# Altium PCB BombaPCB.PcbDoc
Units mm, origin at the board's own origin, x right, y up, seen from the top; angles counter-clockwise.
Board outline 68.25 x 42.25 mm, 2 copper layers (Top Layer, Bottom Layer); 12 components, 25 nets, 97 pads, 0 vias.
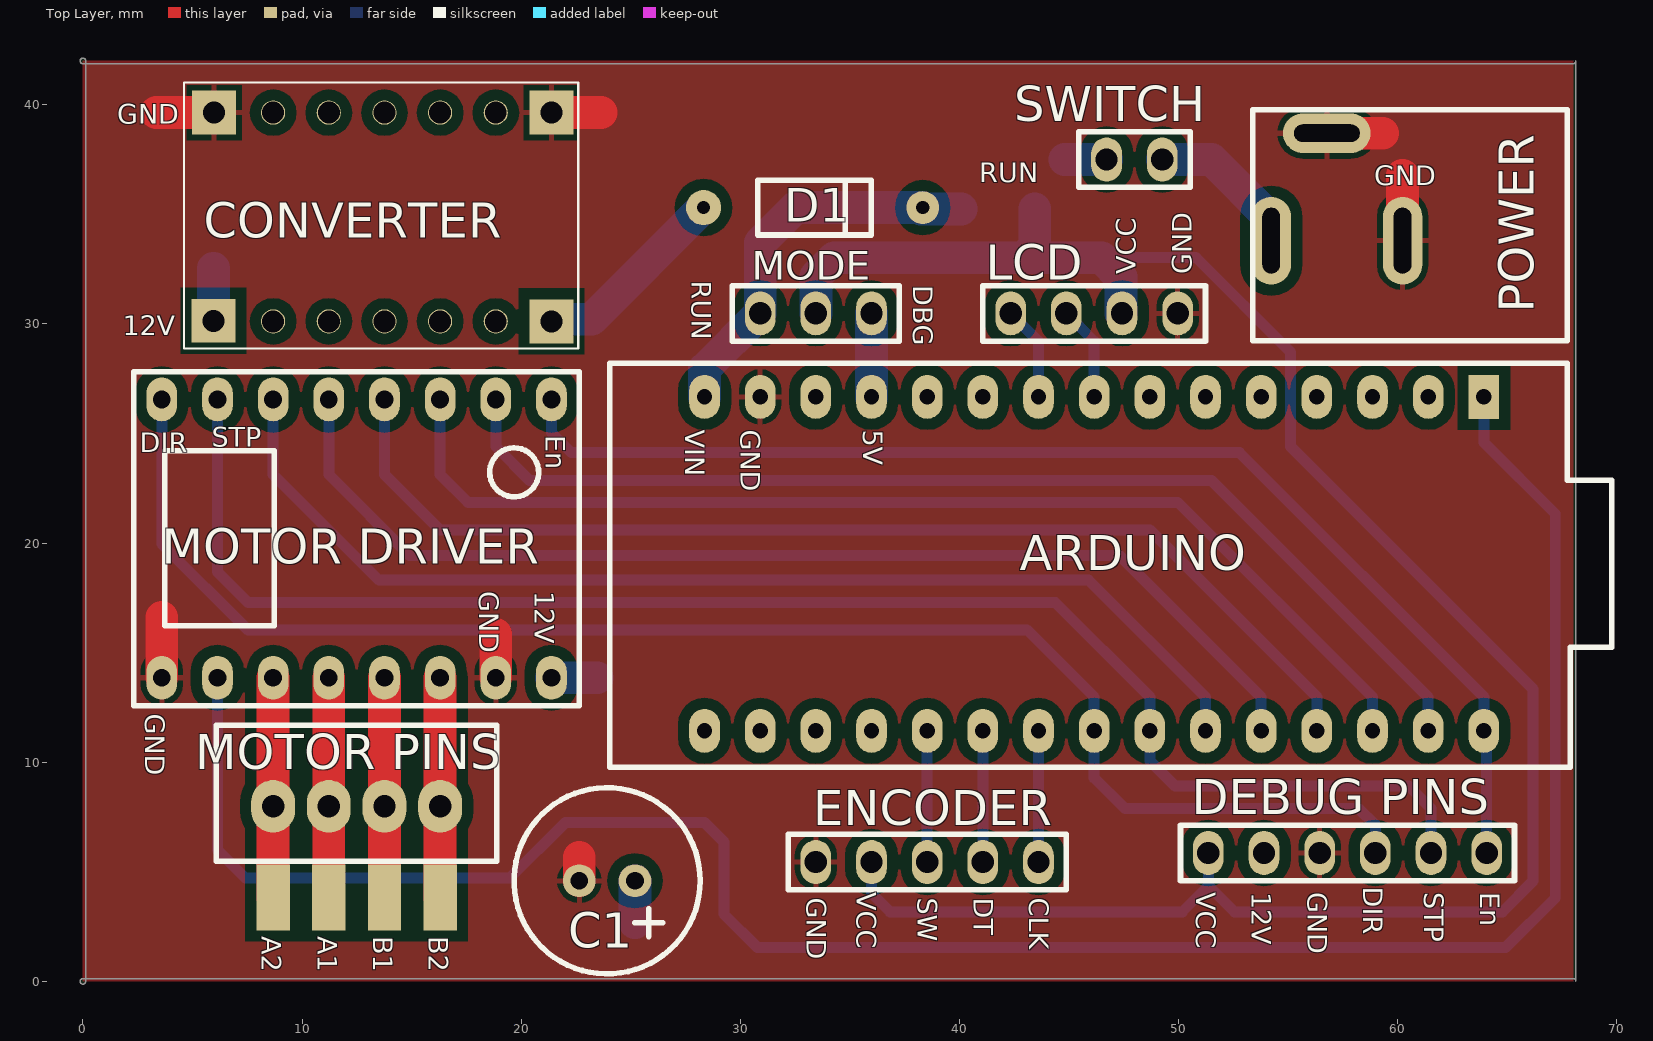
[diagram p0: Top Layer view]
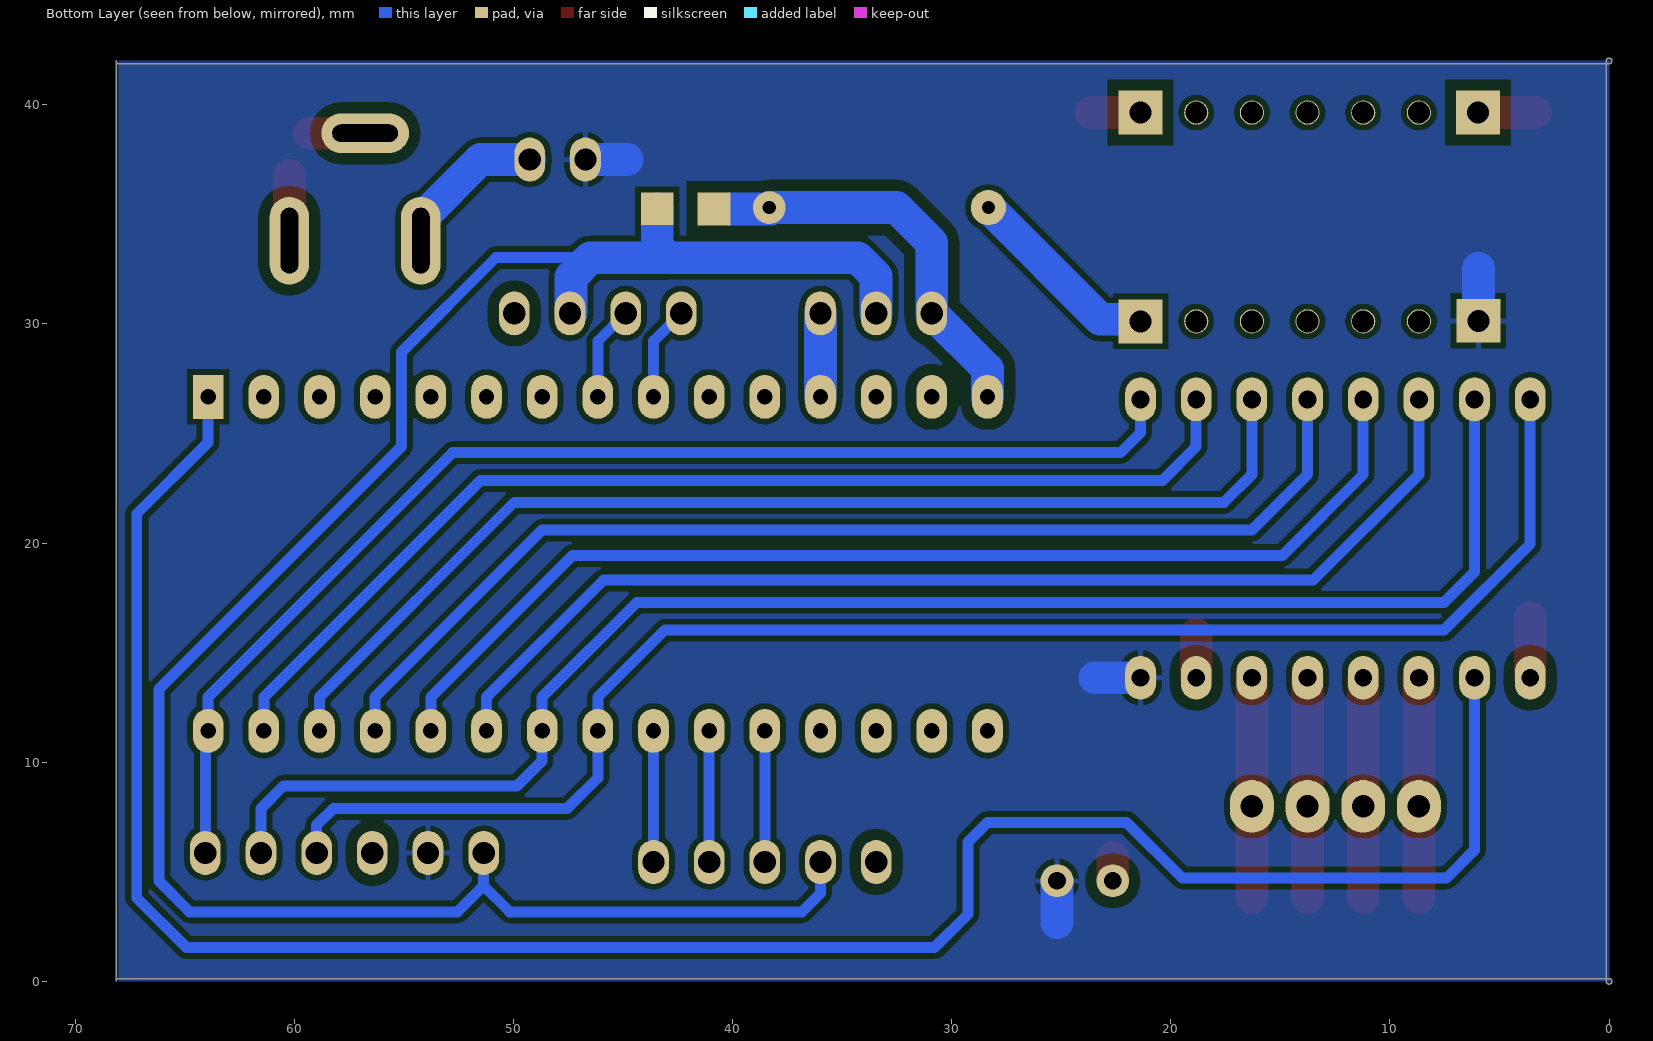
[diagram p1: Bottom Layer view, seen from below]
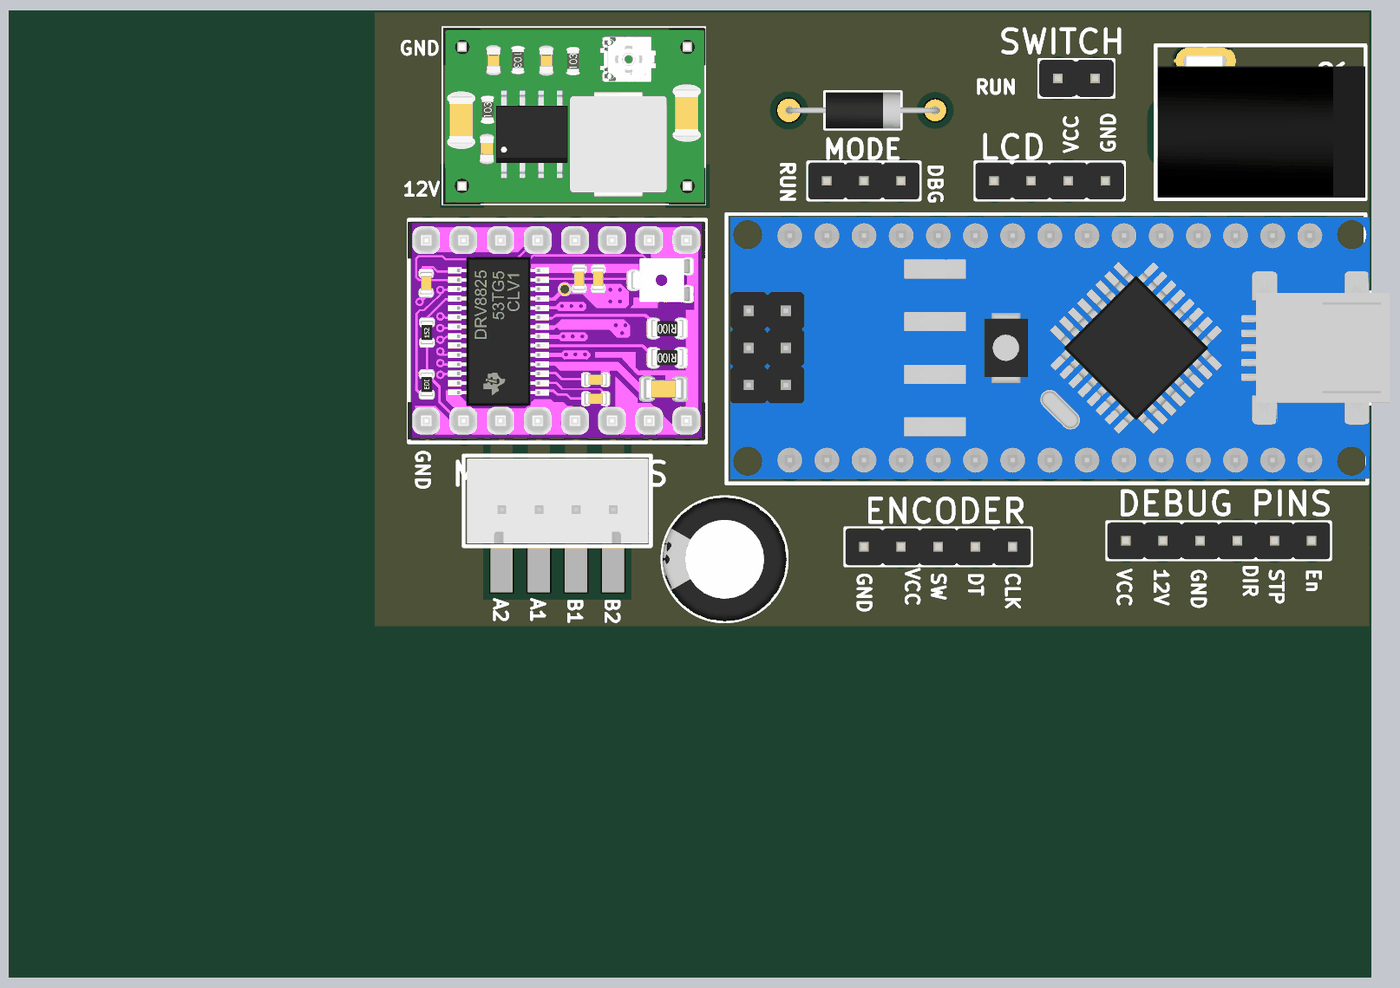
[diagram p2: 3D render of the assembled board from above, using the file's embedded part models]

## Layer stack, top to bottom
Top Solder: solder mask 0.0102, Solder Resist, Dk 3.5
Top Layer: signal copper 0.0356
Dielectric 1: dielectric 0.32, FR-4, Dk 4.8
Bottom Layer: signal copper 0.0356
Bottom Solder: solder mask 0.0102, Solder Resist, Dk 3.5

## Board outline
-0.127,0 cw(c0,0) 0,0.127 68,0.127 cw(c68,0) 68.127,0 68.127,42 cw(c68,42) 68,41.873 0,41.873 cw(c0,42) -0.127,42 cw(c0,42) 0,42.127 cw(c0,42) 0.127,42 0.127,0 cw(c0,0) 0,-0.127 cw(c0,0)
cut-out: -25,-24 -24.746,-24 -24.746,-23.746 -25,-23.746
cut-out: -25,-24 -24.746,-24 -24.746,-23.746 -25,-23.746
cut-out: -25,-24 -24.746,-24 -24.746,-23.746 -25,-23.746

## Design rules (kind name [scope] priority, off if disabled: settings)
Clearance Clearance_POWER [InNet('5V','12','GND')] p1: gap=0.254 except(0.5: Arc-Poly Track-Poly SMDPad-Poly THPad-Poly Via-Poly Fill-Poly Poly-Poly)
Clearance Clearance_all [All] p2: gap=0.254
PolygonConnect [All] p1: connectstyle=Relief reliefconductorwidth=0.254 reliefentries=4 polygonreliefangle="90 Angle" airgapwidth=0.254
RoutingVias [All] p1: holewidth=0.711 width=1.27 viastyle="Through Hole" minholewidth=0.711 minwidth=1.27 maxholewidth=0.711 maxwidth=1.27
SolderMaskExpansion [All] p1: expansion=0.102
Width [All] p1: maxlimit=2 minlimit=0.254 preferedwidth=0.254 minimp=50.000000 maximp=50.000000 favimp=50.000000
30 further rules are at their usual default settings.

## Components (designator, comment, footprint, x,y, rotation, side; value= is the part's Value field where it differs from the comment)
ARDUINO "Arduino Nano" arduinoNanoPCB 71.545,29.21 r180 top (schematic designator AR1)
C1 "CER" "Cap ER 8.5D11.5H" 25.19,4.588 r180 top
CONVERTER "BUCK CONVERTER" "MP2307N HEADER" 21.38,37.1 r180 top (schematic designator CONVERTIDOR)
D1 "1N5817" "D0 41" 28.321,35.306 r0 top
"DEBUG PINS" "Header TH S 6" Header_TH_S_6 51.352,5.858 r0 top
ENCODER "Header TH S 5" Header_TH_S_5 33.445,5.445 r0 top
LCD "Header TH S 4" Header_TH_S_4 49.955,30.48 r180 top
MODE "Header TH S 3" Header_TH_S_3 30.905,30.48 r0 top (schematic designator "POWER SELECTOR")
"MOTOR DRIVER" "DVR8825" DRV8825 2.33,12.43 r0 top
"MOTOR PINS" "Header TH Lock 4" HEADER_TH_LOCK_4 8.68,7.985 r0 top
POWER "Power Jack" PoweJack 68.878,40.021 r180 top
SWITCH "Header TH S 2" Header_TH_S_2 49.25,37.5 r180 top

## Footprints (in the part's own frame and the unit in brackets; to place one, negate y for a bottom-side part, rotate by r counter-clockwise, add the part's x,y. Pads: shape width x height; smd on the part's side, far side on the other; paste and mask are expansions set on the pad)
arduinoNanoPCB [mm]
  oval 1.4x2 hole 0.7: 1(30.48,17.78) 2(27.94,17.78) 3V3(10.16,2.54) 5V(35.56,2.54) 9(25.4,17.78) 10(22.86,17.78) 11(20.32,17.78) 12(17.78,17.78) 13(15.24,17.78) 14(12.7,17.78) 15(10.16,17.78) 16(7.62,17.78) 19(30.48,2.54) 21(12.7,2.54) 22(33.02,2.54) 23(15.24,2.54) 24(17.78,2.54) 25(20.32,2.54) 26(22.86,2.54) 27(25.4,2.54) 28(27.94,2.54) 29(38.1,17.78) 29A(38.1,2.54) 30(40.64,17.78) 31(43.18,17.78) 32(33.02,17.78) G0(35.56,17.78) G1(40.64,2.54) VIN(43.18,2.54)
  rect 1.4x2 hole 0.7: 17(7.62,2.54)
  silkscreen extent 1.78,1 47.5,19.43, body extent 2.14,1.21 47.24,19.11, height 20.8
"Cap ER 8.5D11.5H" [mm] "470uF 16V"
  round 1.5 hole 0.813: +(0,0) -(2.54,0)
  silkscreen extent -2.98,-4.25 5.52,4.25, body extent -2.98,-4.25 5.53,4.25, height 11.51
"D0 41" [mm]
  round 1.6 hole 0.6: A(0,0)
  round 1.5 hole 0.6: K(10,0)
  silkscreen extent 2.46,-1.25 7.65,1.25, body extent -0.2,-1.25 10.36,1.25, height 2.5
DRV8825 [mm] "DRV8825 MODULO"
  oval 1.4x2 hole 0.813: 1(19.05,14.122) 2(16.51,14.122) 3(13.97,14.122) 4(11.43,14.122) 5(8.89,14.122) 6(6.35,14.122) 7(3.81,14.122) 8(1.27,14.122) 9(1.27,1.422) 10(3.81,1.422) 11(6.35,1.422) 12(8.89,1.422) 13(11.43,1.422) 14(13.97,1.422) 15(16.51,1.422) 16(19.05,1.422)
  silkscreen extent 0,0.15 20.32,15.39, body extent -0.07,0.36 20.25,15.25, height 13.36
HEADER_TH_LOCK_4 [mm] "Header Throough Hole Lock 4 Pins"
  oval 2x2.4 hole 1.016: 0(0,0) 1(2.54,0) 2(5.08,0) 3(7.62,0)
  silkscreen extent -2.6,-2.5 10.2,3.7, body extent -2.38,-2.3 10.02,3.5, height 9.6
Header_TH_S_2 [mm] "Header Throough Hole Simple 2 Pines"
  oval 1.4x2 hole 1.016: 0(0,0) 1(2.54,0)
  silkscreen extent -1.27,-1.27 3.81,1.27, body extent -1.27,-1.27 3.81,1.27, height 8.54
Header_TH_S_3 [mm] "Header Throough Hole Simple 3 Pines"
  oval 1.4x2 hole 1.016: 0(0,0) 1(2.54,0) 2(5.08,0)
  silkscreen extent -1.27,-1.27 6.35,1.27, body extent -1.27,-1.27 6.35,1.27, height 8.54
Header_TH_S_4 [mm] "Header Throough Hole Simple 4 Pines"
  oval 1.4x2 hole 1.016: 0(0,0) 1(2.54,0) 2(5.08,0) 3(7.62,0)
  silkscreen extent -1.27,-1.27 8.89,1.27, body extent -1.27,-1.27 8.89,1.27, height 8.54
Header_TH_S_5 [mm] "Header Throough Hole Simple 5 Pines"
  oval 1.4x2 hole 1.016: 0(0,0) 1(2.54,0) 2(5.08,0) 3(7.62,0) 4(10.16,0)
  silkscreen extent -1.27,-1.27 11.43,1.27, body extent -1.27,-1.27 11.43,1.27, height 8.54
Header_TH_S_6 [mm] "Header Throough Hole Simple 6 Pines"
  oval 1.4x2 hole 1.016: 0(0,0) 1(2.54,0) 2(5.08,0) 3(7.62,0) 4(10.16,0) 5(12.7,0)
  silkscreen extent -1.27,-1.27 13.97,1.27, body extent -1.27,-1.27 13.97,1.27, height 8.54
"MP2307N HEADER" [mm] "Buck Converter"
  rect 2x2 hole 1: IN+(15.418,6.96) IN-(15.392,-2.54) OUT+(0,6.985) OUT-(0,-2.54)
  round 1.1 hole 1: ""(2.54,6.985) ""(2.54,-2.54) ""(5.08,6.985) ""(5.08,-2.54) ""(7.62,6.985) ""(7.62,-2.54) ""(10.16,6.985) ""(10.16,-2.54) ""(12.7,6.985) ""(12.7,-2.54)
  silkscreen extent -1.22,-3.91 16.76,8.23, body extent -1.26,-3.82 16.68,8.25, height 14.42
PoweJack [mm]
  oval 1.8x4 hole 0.8 slot 3 at 90 deg: 1(8.661,6.223) 3(14.656,6.223)
  oval 4x1.8 hole 0.8 slot 3 at 0 deg: 2(12.116,1.321)
  silkscreen extent 1.14,0.25 15.49,10.8, body extent 1.15,0.89 15.36,10.69, height 11

## Part data
ARDUINO: "Arduino Nano Generico"
C1: library part "Cap R8D12H", "470uF 16V"
CONVERTER: library part "MP2307N BOARD HEADERED", "DC-DC BUCK CONVERTER"
D1: library part "Diodo Schottky TH", "Diodo Schottky"
"DEBUG PINS": "Header Through Hole Simple 6 pines"
ENCODER: "Header Through Hole Simple 5 pines"
LCD: "Header Through Hole Simple 4 pines"
MODE: "Header Through Hole Simple 3 pines"
"MOTOR DRIVER": library part "DVR8825 MODULO", "DVR8825 MODULO"
"MOTOR PINS": "Header Through Hole Lock 4 pines"
POWER: library part PowerJack12V, "Power Jack 15mm"
SWITCH: "Header Through Hole Simple 2 pines"

## Free pads (board coordinates)
  rect 1.5x1.5 smd far side: 5V(40.838,35.25) VCC(43.434,35.255)
  rect 1.524x3 smd: A1(11.22,3.826) A2(8.68,3.826) B1(13.76,3.826) B2(16.3,3.826)

## Nets (pads, with @x,y where several pads share a name; then routed paths per layer and width w, separated by ;. In a path a pad name is that pad's centre, name@x,y a point inside that pad or via, vN(x,y) a via of type N, cw(c..) or ccw(c..) an arc to the next point about the centre after c; other vN are vias at no path point)
5V: ARDUINO.VIN D1.K MODE.0 pad.5V | length 18.3
  Bottom Layer w0.5: D1.K@38.25,35 D1.K@38.5,35.25
  Bottom Layer w1.5: ARDUINO.VIN 28.365,27.94 MODE.0 30.905,33.699 32.512,35.306 D1.K ; D1.K@38.25,35.25 38.5,35.25 40.076,35.25
12V: "DEBUG PINS.1" "MOTOR DRIVER.16" C1.+ CONVERTER.IN+ SWITCH.1 | length 8.3
  Bottom Layer w1.5: CONVERTER.IN+ 5.962,32.538 ; 21.38,13.852 23.452,13.852 ; 25.19,2.69 C1.+ ; 44.8,37.5 SWITCH.1
A1: "MOTOR DRIVER.12" "MOTOR PINS.1" pad.A1 | length 10
  Top Layer w1.5: pad.A1 11.22,7.985 11.22,13.852
A2: "MOTOR DRIVER.11" "MOTOR PINS.0" pad.A2 | length 10
  Top Layer w1.5: pad.A2 8.68,7.985 8.68,13.852
B1: "MOTOR DRIVER.13" "MOTOR PINS.2" pad.B1 | length 10
  Top Layer w1.5: pad.B1 13.76,7.985 13.76,13.852
B2: "MOTOR DRIVER.14" "MOTOR PINS.3" pad.B2 | length 10
  Top Layer w1.5: pad.B2 16.3,7.985 16.3,13.852
CLK: ARDUINO.2 ENCODER.4 | length 6
  Bottom Layer w0.5: ENCODER.4 ARDUINO.2
DIR: "DEBUG PINS.3" "MOTOR DRIVER.8" ARDUINO.9 | length 71
  Bottom Layer w0.5: 3.6,26.552 3.6,19.955 7.529,16.026 43.089,16.026 46.145,12.97 ARDUINO.9 46.145,9.287 47.542,7.89 58.21,7.89 58.972,7.128 58.972,5.604
DT: ARDUINO.1 ENCODER.3 | length 6
  Bottom Layer w0.5: ENCODER.3 ARDUINO.1
EN: "DEBUG PINS.5" "MOTOR DRIVER.1" ARDUINO.16 | length 56.3
  Bottom Layer w0.5: 21.38,26.552 21.38,25.035 22.285,24.13 52.765,24.13 63.925,12.97 ARDUINO.16 ; 64.052,5.604 ARDUINO.16@64.052,11.303
FLT: "MOTOR DRIVER.10" ARDUINO.17 | length 99.9
  Bottom Layer w0.5: 6.14,13.852 6.14,5.985 7.41,4.715 19.475,4.715 22.015,7.255 28.365,7.255 29.254,6.366 29.254,3.064 30.778,1.54 64.913,1.54 67.183,3.81 67.183,21.336 63.925,24.594 ARDUINO.17
GND: "DEBUG PINS.2" "MOTOR DRIVER.9" "MOTOR DRIVER.15" ARDUINO.G1 C1.- CONVERTER.IN- CONVERTER.OUT- ENCODER.0 LCD.0 POWER.1 POWER.2 | length 16.2
  Top Layer w1.5: 3.36,39.64 CONVERTER.IN- ; 3.6,13.852 3.6,16.6 ; 18.84,13.852 18.84,15.84 ; CONVERTER.OUT- 23.64,39.64 ; C1.- 22.65,5.65 ; POWER.2 59.3,38.7 ; POWER.1 60.217,36.783
MS0: "MOTOR DRIVER.2" ARDUINO.15 | length 51
  Bottom Layer w0.5: 18.84,26.552 18.84,24.4 20.38,22.86 51.495,22.86 61.385,12.97 ARDUINO.15
MS1: "MOTOR DRIVER.3" ARDUINO.14 | length 51.7
  Bottom Layer w0.5: 16.3,26.552 16.3,23.13 17.57,21.86 49.955,21.86 58.845,12.97 ARDUINO.14
MS2: "MOTOR DRIVER.4" ARDUINO.13 | length 51.7
  Bottom Layer w0.5: 13.76,26.552 13.76,23.13 16.3,20.59 48.685,20.59 56.305,12.97 ARDUINO.13
NetCONVERTER_OUT+: CONVERTER.OUT+ D1.A | length 9
  Bottom Layer w1.5: CONVERTER.OUT+@21.38,30.21 23.21,30.21 D1.A@28.25,35.25
ON: POWER.3 SWITCH.0 | length 7.3
  Bottom Layer w1.5: SWITCH.0 51.5,37.5 54.222,34.778 POWER.3 ; POWER.3@54.273,33.909 POWER.3@54.273,34.147
RST: "MOTOR DRIVER.5" ARDUINO.12 | length 51.7
  Bottom Layer w0.5: 11.22,26.552 11.22,23.13 14.911,19.439 47.296,19.439 53.765,12.97 ARDUINO.12
SCL: ARDUINO.28 LCD.3 | length 4.3
  Bottom Layer w0.5: LCD.3 43.605,29.21 ARDUINO.28
SDA: ARDUINO.27 LCD.2 | length 4.3
  Bottom Layer w0.5: LCD.2 46.145,29.21 ARDUINO.27
SLP: "MOTOR DRIVER.6" ARDUINO.11 | length 51.7
  Bottom Layer w0.5: 8.68,26.552 8.68,23.13 13.506,18.304 45.891,18.304 51.225,12.97 ARDUINO.11
STP: "DEBUG PINS.4" "MOTOR DRIVER.7" ARDUINO.10 | length 71.7
  Bottom Layer w0.5: 6.14,26.552 6.14,18.685 7.537,17.288 44.367,17.288 48.685,12.97 ARDUINO.10 48.685,10.049 49.828,8.906 60.496,8.906 61.512,7.89 61.512,5.604
SW: ARDUINO.32 ENCODER.2 | length 6
  Bottom Layer w0.5: ENCODER.2 ARDUINO.32
VCC: "DEBUG PINS.0" ENCODER.1 LCD.1 MODE.1 pad.VCC | length 94.6
  Bottom Layer w0.5: ENCODER.1 35.985,4.02 36.83,3.175 50.165,3.175 51.352,4.362 ; 46.482,33.02 50.8,33.02 55.101,28.719 55.101,24.401 66.167,13.335 66.167,4.572 64.77,3.175 52.539,3.175 51.352,4.362 ; 51.352,5.858 51.352,4.362
  Bottom Layer w1.5: MODE.1 33.445,32.175 34.29,33.02 42.926,33.02 ; pad.VCC 43.434,33.528 42.926,33.02 ; LCD.1@47.365,30.48 47.365,32.137 46.482,33.02 42.926,33.02
VO5: ARDUINO.5V MODE.2 | length 3.8
  Bottom Layer w1.5: ARDUINO.5V MODE.2
pads on no net: ARDUINO.3V3 ARDUINO.19 ARDUINO.21 ARDUINO.22 ARDUINO.23 ARDUINO.24 ARDUINO.25 ARDUINO.26 ARDUINO.29 ARDUINO.29A ARDUINO.30 ARDUINO.31 ARDUINO.G0 CONVERTER.

## Polygon pours and split planes (outlines as drawn)
GND on Top Layer "GND_L01_P008" (solid, pour order 8): 0,42 68,42 68,0 0,0
12V on Bottom Layer "12V_L02_P010" (solid, pour order 10): 0,42 68,42 68,0 0,0

## Silkscreen, mask and mechanical layers (free items; w line width, h text height)
Top Overlay:
  text "GND" at 1.568,39.132 h0.9
  text "RUN" at 40.907,36.471 h0.9
  text "GND" at 58.928,36.322 h0.9
  text "VCC" at 48.05,32.274 h0.9 r90
  text "GND" at 50.59,32.274 h0.9 r90
  text "RUN" at 27.784,31.966 h0.9 r270
  text "DBG" at 37.89,31.766 h0.9 r270
  text "12V" at 1.822,29.48 h0.9
  text "VIN" at 27.476,25.162 h0.9 r270
  text "GND" at 30.016,25.162 h0.9 r270
  text "5V" at 35.604,25.162 h0.9 r270
  text "En" at 21.126,24.908 h0.9 r270
  text "STP" at 5.886,24.4 h0.9
  text "DIR" at 2.584,24.146 h0.9
  text "GND" at 18.078,17.796 h0.9 r270
  text "12V" at 20.618,17.796 h0.9 r270
  text "GND" at 2.838,12.208 h0.9 r270
  text "DIR" at 58.42,4.318 h0.9 r270
  text "VCC" at 35.306,4.064 h0.9 r270
  text "VCC" at 50.8,4.064 h0.9 r270
  text "12V" at 53.34,4.064 h0.9 r270
  text "GND" at 55.88,4.064 h0.9 r270
  text "STP" at 61.214,4.064 h0.9 r270
  text "En" at 63.754,4.064 h0.9 r270
  text "GND" at 33.02,3.81 h0.9 r270
  text "SW" at 38.1,3.81 h0.9 r270
  text "DT" at 40.64,3.81 h0.9 r270
  text "CLK" at 43.18,3.81 h0.9 r270
  text "A2" at 8.172,2.048 h0.9 r270
  text "A1" at 10.712,2.048 h0.9 r270
  text "B1" at 13.252,2.048 h0.9 r270
  text "B2" at 15.792,2.048 h0.9 r270
Bottom Solder:
  lines w0.254: 0,0 0,42 68,42 68,0 0,0